# EAGLE board AMS Test Board rev1 (EAGLE 9.6.2)
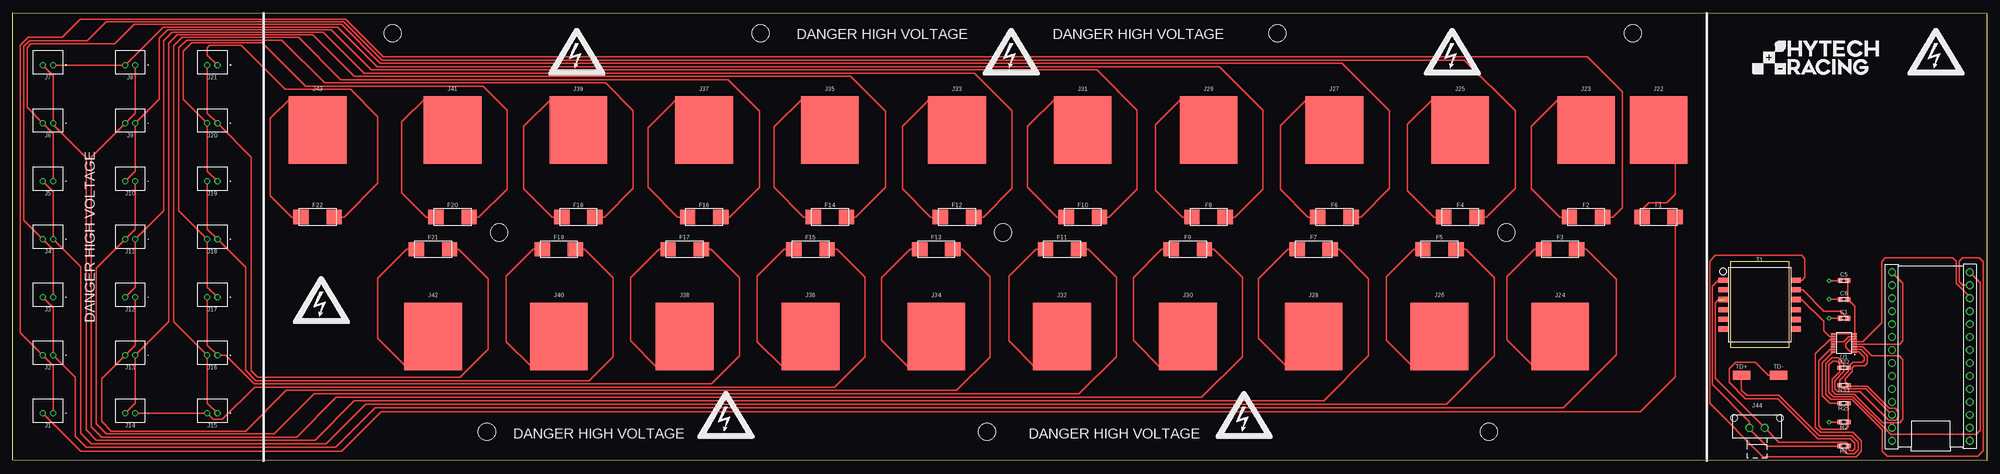
[diagram p0: board, top side]
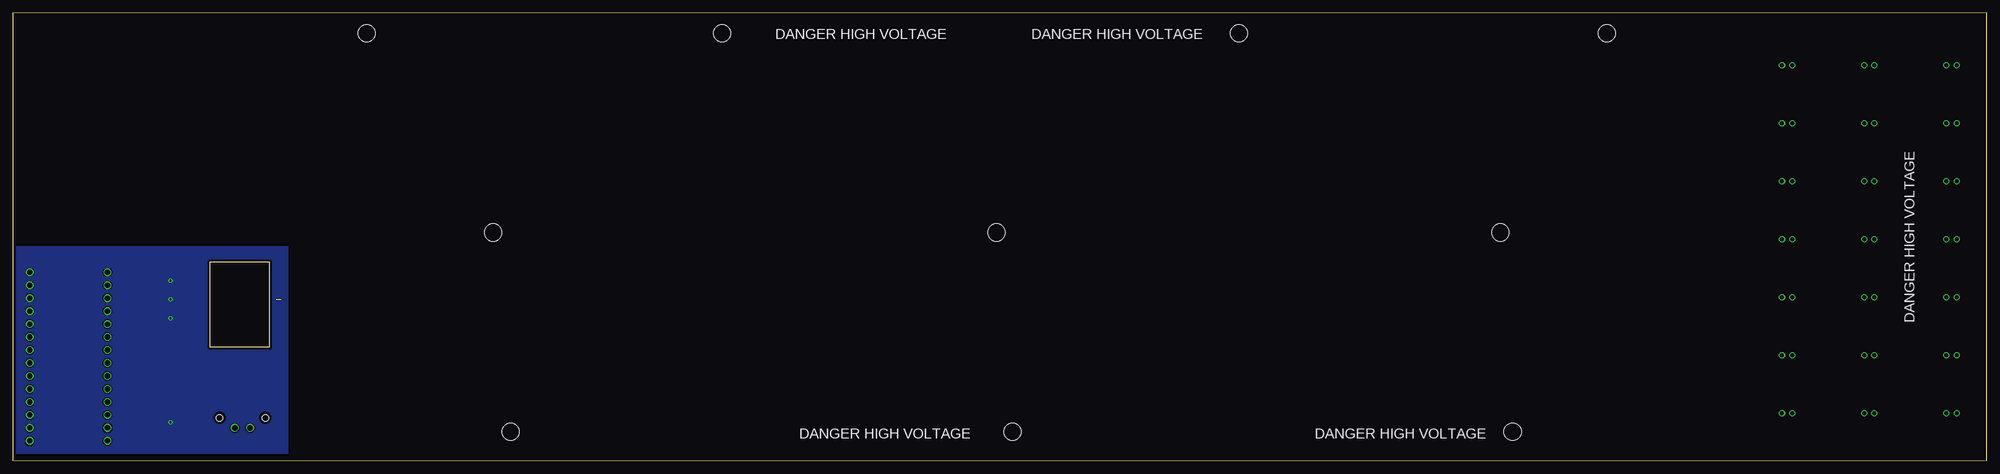
[diagram p1: board, bottom side, seen from below]

Size 386.61 x 87.73 mm. Coordinates in mm from the lower left corner, seen from the top.
Outline: 0,0.1 0,87.73 386.61,87.63 386.61,0 0,0.1
Copper layers (1*16): Top 0.035mm / dielectric 1.53mm / Bottom 0.035mm
Design rules "HyTech Default (2 Layer)": minimum track width 6mil, minimum drill 14mil, track to track 6mil, track to pad 6mil, pad to pad 6mil, via to via 20mil, smd to smd 6mil, copper to edge 20mil, drill to drill 21mil, minimum pad ring 7mil, minimum via ring 8mil, stop-mask expansion 6mil, vias tented up to drill 30mil, thermal gap 10mil

## Footprints (pad centres in the part's own frame; a part is rotated, then mirrored left to right if it is on the bottom)
TEENSY_SHORT = drill 1.016: 3.3V 0,5.08; AGND/GND 0,2.54; D0 15.24,2.54; D1 15.24,5.08; D2 15.24,7.62; D3 15.24,10.16; D4 15.24,12.7; D5 15.24,15.24; D6 15.24,17.78; D7 15.24,20.32; D8 15.24,22.86; D9 15.24,25.4; D10 15.24,27.94; D11 15.24,30.48; D12 15.24,33.02; D13 0,33.02; D14 0,30.48; D15 0,27.94; D16 0,25.4; D17 0,22.86; D18 0,20.32; D19 0,17.78; D20 0,15.24; D21 0,12.7; D22 0,10.16; D23 0,7.62; GND 15.24,0; VIN 0,0
0603-CAP = smd 0.9 x 0.9: 1 -0.75,0; 2 0.75,0
OMF_125 = smd 3 x 2.8: 1 -3.25,0; 2 3.25,0
B2B-PH-K = drill 0.8: 1 -1,0.55; 2 1,0.55
5222 = smd 11.303 x 13.208: 1 0,0
MOLEX_MICROFIT_PTH_VERTICAL_02_SINGLE = drill 1.067: 1 1.499,0; 2 -1.499,0 | hole 1.321: 4.496,-1.956; -4.496,-1.956
0603-RES = smd 0.9 x 0.8: 1 -0.85,0; 2 0.85,0
HM2112ZNLT_AIRGAP = smd 1.02 x 1.89: 1 -4.78,-7.145; 2 -2.89,-7.145; 3 -1,-7.145; 4 1,-7.145; 5 2.875,-7.145; 6 4.78,-7.145; 7 4.78,7.145; 8 2.89,7.145; 9 1,7.145; 10 -1,7.145; 11 -2.89,7.145; 12 -4.78,7.145
MICRO_MINIATURE = smd 3.429 x 1.778: 1 0,0
MSOP-16 = smd 0.305 x 0.889: 1 -1.75,-2.106; 2 -1.25,-2.106; 3 -0.75,-2.106; 4 -0.25,-2.106; 5 0.25,-2.106; 6 0.75,-2.106; 7 1.25,-2.106; 8 1.75,-2.106; 9 1.75,2.106; 10 1.25,2.106; 11 0.75,2.106; 12 0.25,2.106; 13 -0.25,2.106; 14 -0.75,2.106; 15 -1.25,2.106; 16 -1.75,2.106
MOUNTING_M3 = hole 3.4: 0,0

## Placement (x,y rotation side)
A1  TEENSY_4.0  [TEENSY_SHORT]  368.05,3.91 0 top
C1  CAPACITOR_0603_10V_10NF  [0603-CAP]  358.65,27.91 180 top
C5  CAPACITOR_0603_10V_0.1UF  [0603-CAP]  358.65,35.28 180 top
C6  CAPACITOR_0603_10V_10NF  [0603-CAP]  358.65,31.6 0 top
F1  FUSE_OMF_125_.5A  [OMF_125]  322.35,47.73 0 top
F2  FUSE_OMF_125_.5A  [OMF_125]  308.13,47.73 0 top
F3  FUSE_OMF_125_.5A  [OMF_125]  303.05,41.43 0 top
F4  FUSE_OMF_125_.5A  [OMF_125]  283.49,47.73 0 top
F5  FUSE_OMF_125_.5A  [OMF_125]  279.43,41.43 0 top
F6  FUSE_OMF_125_.5A  [OMF_125]  258.85,47.73 0 top
F7  FUSE_OMF_125_.5A  [OMF_125]  254.79,41.43 0 top
F8  FUSE_OMF_125_.5A  [OMF_125]  234.21,47.73 0 top
F9  FUSE_OMF_125_.5A  [OMF_125]  230.15,41.43 0 top
F10  FUSE_OMF_125_.5A  [OMF_125]  209.58,47.73 0 top
F11  FUSE_OMF_125_.5A  [OMF_125]  205.51,41.43 0 top
F12  FUSE_OMF_125_.5A  [OMF_125]  184.94,47.73 0 top
F13  FUSE_OMF_125_.5A  [OMF_125]  180.87,41.43 0 top
F14  FUSE_OMF_125_.5A  [OMF_125]  160.05,47.73 0 top
F15  FUSE_OMF_125_.5A  [OMF_125]  156.24,41.43 0 top
F16  FUSE_OMF_125_.5A  [OMF_125]  135.41,47.73 0 top
F17  FUSE_OMF_125_.5A  [OMF_125]  131.6,41.43 0 top
F18  FUSE_OMF_125_.5A  [OMF_125]  110.77,47.73 0 top
F19  FUSE_OMF_125_.5A  [OMF_125]  106.96,41.43 0 top
F20  FUSE_OMF_125_.5A  [OMF_125]  86.13,47.73 0 top
F21  FUSE_OMF_125_.5A  [OMF_125]  82.32,41.43 0 top
F22  FUSE_OMF_125_.5A  [OMF_125]  59.72,47.73 0 top
J1  CONNECTOR-2__B2B-PH-K  [B2B-PH-K]  6.9,9.84 180 top
J2  CONNECTOR-2__B2B-PH-K  [B2B-PH-K]  6.9,21.2 180 top
J3  CONNECTOR-2__B2B-PH-K  [B2B-PH-K]  6.9,32.56 180 top
J4  CONNECTOR-2__B2B-PH-K  [B2B-PH-K]  6.9,43.92 180 top
J5  CONNECTOR-2__B2B-PH-K  [B2B-PH-K]  6.9,55.28 180 top
J6  CONNECTOR-2__B2B-PH-K  [B2B-PH-K]  6.9,66.64 180 top
J7  CONNECTOR-2__B2B-PH-K  [B2B-PH-K]  6.9,78 180 top
J8  CONNECTOR-2__B2B-PH-K  [B2B-PH-K]  23,78 180 top
J9  CONNECTOR-2__B2B-PH-K  [B2B-PH-K]  23,66.64 180 top
J10  CONNECTOR-2__B2B-PH-K  [B2B-PH-K]  23,55.28 180 top
J11  CONNECTOR-2__B2B-PH-K  [B2B-PH-K]  23,43.92 180 top
J12  CONNECTOR-2__B2B-PH-K  [B2B-PH-K]  23,32.56 180 top
J13  CONNECTOR-2__B2B-PH-K  [B2B-PH-K]  23,21.2 180 top
J14  CONNECTOR-2__B2B-PH-K  [B2B-PH-K]  23,9.84 180 top
J15  CONNECTOR-2__B2B-PH-K  [B2B-PH-K]  39.1,9.84 180 top
J16  CONNECTOR-2__B2B-PH-K  [B2B-PH-K]  39.1,21.2 180 top
J17  CONNECTOR-2__B2B-PH-K  [B2B-PH-K]  39.1,32.56 180 top
J18  CONNECTOR-2__B2B-PH-K  [B2B-PH-K]  39.1,43.92 180 top
J19  CONNECTOR-2__B2B-PH-K  [B2B-PH-K]  39.1,55.28 180 top
J20  CONNECTOR-2__B2B-PH-K  [B2B-PH-K]  39.1,66.64 180 top
J21  CONNECTOR-2__B2B-PH-K  [B2B-PH-K]  39.1,78 180 top
J22  CONNECTOR-1_5222  [5222]  322.35,64.77 0 top
J23  CONNECTOR-1_5222  [5222]  308.13,64.77 0 top
J24  CONNECTOR-1_5222  [5222]  303.05,24.38 0 top
J25  CONNECTOR-1_5222  [5222]  283.49,64.77 0 top
J26  CONNECTOR-1_5222  [5222]  279.43,24.38 0 top
J27  CONNECTOR-1_5222  [5222]  258.85,64.77 0 top
J28  CONNECTOR-1_5222  [5222]  254.79,24.38 0 top
J29  CONNECTOR-1_5222  [5222]  234.21,64.77 0 top
J30  CONNECTOR-1_5222  [5222]  230.15,24.38 0 top
J31  CONNECTOR-1_5222  [5222]  209.58,64.77 0 top
J32  CONNECTOR-1_5222  [5222]  205.51,24.38 0 top
J33  CONNECTOR-1_5222  [5222]  184.94,64.77 0 top
J34  CONNECTOR-1_5222  [5222]  180.87,24.38 0 top
J35  CONNECTOR-1_5222  [5222]  160.05,64.77 0 top
J36  CONNECTOR-1_5222  [5222]  156.24,24.38 0 top
J37  CONNECTOR-1_5222  [5222]  135.41,64.77 0 top
J38  CONNECTOR-1_5222  [5222]  131.6,24.38 0 top
J39  CONNECTOR-1_5222  [5222]  110.77,64.77 0 top
J40  CONNECTOR-1_5222  [5222]  106.96,24.38 0 top
J41  CONNECTOR-1_5222  [5222]  86.13,64.77 0 top
J42  CONNECTOR-1_5222  [5222]  82.32,24.38 0 top
J43  CONNECTOR-1_5222  [5222]  59.72,64.77 0 top
J44  CONNECTOR-2_MF_T_V_  [MOLEX_MICROFIT_PTH_VERTICAL_02_SINGLE]  341.63,6.45 180 top
R1  RESISTOR_0603_120  [0603-RES]  358.65,2.9 180 top
R2  RESISTOR_0603_1K  [0603-RES]  358.65,7.59 180 top
R25  RESISTOR_0603_1K  [0603-RES]  358.65,11.28 0 top
R32  RESISTOR_0603_2K  [0603-RES]  358.65,18.26 0 top
R33  RESISTOR_0603_2K  [0603-RES]  358.65,14.83 180 top
T1  TRANSFORMER_HM2112ZNLT_AIRGAP  [HM2112ZNLT_AIRGAP]  342.14,30.58 270 top
TD+  TEST_POINT  [MICRO_MINIATURE]  338.58,16.74 0 top
TD-  TEST_POINT  [MICRO_MINIATURE]  345.82,16.74 0 top
U1  LTC6820  [MSOP-16]  358.65,23.09 90 top
U$1  [MOUNTING_M3]  74.37,83.69 0 top
U$2  [MOUNTING_M3]  146.46,83.69 0 top
U$3  [MOUNTING_M3]  247.68,83.69 0 top
U$4  [MOUNTING_M3]  317.32,83.69 0 top
U$5  [HV_LARGE]  60.45,31.47 0 top
U$6  [HV_LARGE]  415.8,39.47 0 bottom  (outside the outline)
U$7  [HV_LARGE]  376.68,80.11 0 top
U$8  [HV_LARGE]  139.7,8.99 0 top
U$9  [HV_LARGE]  241.17,8.99 0 top
U$10  [HV_LARGE]  281.94,80.11 0 top
U$11  [HV_LARGE]  195.58,80.11 0 top
U$12  [HV_LARGE]  110.49,80.11 0 top
U$13  [DANGER_HIGH_VOLTAGE]  114.81,5.31 0 top
U$14  [DANGER_HIGH_VOLTAGE]  215.77,5.31 0 top
U$15  [DANGER_HIGH_VOLTAGE]  170.31,83.54 0 top
U$16  [DANGER_HIGH_VOLTAGE]  220.47,83.54 0 top
U$17  [DANGER_HIGH_VOLTAGE]  401.32,42.6 90 top  (outside the outline)
U$18  [DANGER_HIGH_VOLTAGE]  15.11,43.87 90 top
U$19  [LOGO_HYTECH_MEDIUM]  340.61,75.67 0 top
U$20  [MOUNTING_M3]  95.28,44.7 0 top
U$21  [MOUNTING_M3]  193.95,44.7 0 top
U$22  [MOUNTING_M3]  292.51,44.7 0 top
U$29  [MOUNTING_M3]  92.86,5.72 0 top
U$30  [MOUNTING_M3]  190.78,5.72 0 top
U$31  [MOUNTING_M3]  289.08,5.72 0 top

## Library data of the parts
A1 = HyTechDevices; TEENSY: 4.0
C1 = HyTechDevices - Copy; CAPACITANCE: 10nF; DKPN: 311-4054-1-ND; MANUFACTURER: Yageo; MOPN: 603-CC603KRX7R6BB103; MPN: CC0603KRX7R6BB103; TOLERANCE: 10%; VOLTAGE: 10V
C5 = HyTechDevices; CAPACITANCE: 0.1µF; DKPN: 720-1688-1-ND; MANUFACTURER: Vishay Vitramon; MOPN: 77-VJ0603Y104JXQPBC; MPN: VJ0603Y104JXQPW1BC; TOLERANCE: 5%; VOLTAGE: 10V
C6 = HyTechDevices; CAPACITANCE: 10nF; DKPN: 311-4054-1-ND; MANUFACTURER: Yageo; MOPN: 603-CC603KRX7R6BB103; MPN: CC0603KRX7R6BB103; TOLERANCE: 10%; VOLTAGE: 10V
F1-F22 = HyTechDevices; CURRENT: 500mA; DKPN: 486-3694-ND; FUSE_TYPE: SMD; I2T: 0.01; MANUFACTURER: Schurter Inc.; MOPN: 693-3404.0045.11; MPN: 3404.0045.11; VOLTAGE: 125V
J1-J21 = HyTechDevices; DKPN: 455-1704-ND; MANUFACTURER: JST Sales America Inc.; MPN: B2B-PH-K-S(LF)(SN); NWRKPN: 37K9940
J22-J43 = HyTechDevices; DKPN: 36-5222-ND; MANUFACTURER: Keystone Electronics; MODEL: SPRING; MOPN: 534-5222; MPN: 5222
J44 = HyTechDevices - Copy; MANUFACTURER: MOLEX; MPN: 436500217
R1 = HyTechDevices; DKPN: P120DBCT-ND; MANUFACTURER: Panasonic Electronic Components; MOPN: 667-ERA-3AEB121V; MPN: ERA-3AEB121V; POWER: 0.1W; RESISTANCE: 120; TOLERANCE: 0.1%; VOLTAGE_CONTINUOUS: 3.46V; VOLTAGE_MAX: 75V
R2 R25 = HyTechDevices - Copy; DKPN: 311-1.00KHRCT-ND; MANUFACTURER: Yageo; MOPN: 603-RC0603FR-071KL; MPN: RC0603FR-071KL; POWER: 0.1W; RESISTANCE: 1k; TOLERANCE: 1%; VOLTAGE_CONTINUOUS: 10.00V; VOLTAGE_MAX: 75V
R32 R33 = HyTechDevices; DKPN: P2.0KBDCT-ND; MANUFACTURER: Panasonic Electronic Components; MOPN: 667-ERA-3ARB202V; MPN: ERA-3ARB202V; POWER: 0.1W; RESISTANCE: 2k; TOLERANCE: 0.1%; VOLTAGE_CONTINUOUS: 14.14V; VOLTAGE_MAX: 75V
T1 = HyTechDevices; DKPN: 1840-1036-1-ND; MANUFACTURER: Pulse Electronics; MOPN: 673-HM2112ZNLT; MPN: HM2112ZNLT
TD+ TD- = HyTechDevices - Copy; DKPN: 36-5015CT-ND; MANUFACTURER: Keystone Electronics; MOPN: 534-5015; MPN: 5015
U1 = HyTechDevices; MANUFACTURER: Analog Devices; MPN: LTC6820IMS#PBF
U$1-U$22 U$29-U$31 = HyTechManufacturing

## Nets
1-: F1.2 J1.2
2-: F2.2 J1.1 J2.2
3-: F3.2 J2.1 J3.2
4-: F4.2 J3.1 J4.2
5-: F5.2 J4.1 J5.2
6-: F6.2 J5.1 J6.2
7-: F7.2 J6.1 J7.2
8-: F8.2 J7.1 J8.2
9-: F9.2 J8.1 J9.2
10-: F10.2 J9.1 J10.2
11-: F11.2 J10.1 J11.2
12-: F12.2 J11.1 J12.2
13-: F13.2 J12.1 J13.2
14-: F14.2 J13.1 J14.2
15-: F15.2 J14.1 J15.2
16-: F16.2 J15.1 J16.2
17-: F17.2 J16.1 J17.2
18-: F18.2 J17.1 J18.2
19-: F19.2 J18.1 J19.2
20-: F20.2 J19.1 J20.2
21+: F22.2 J21.1
21-: F21.2 J20.1 J21.2
+3V3: A1.3.3V C5.1 C6.2 R32.2 R33.2 U1.1 U1.6 U1.7 U1.8 U1.9 U1.12
GND: A1.AGND/GND A1.GND C1.2 C5.2 C6.1 R2.2
IM: T1.10 U1.10
IP: T1.12 U1.11
N$1: F1.1 J22.1
N$2: F2.1 J23.1
N$3: F3.1 J24.1
N$4: F4.1 J25.1
N$5: F5.1 J26.1
N$6: F6.1 J27.1
N$7: F7.1 J28.1
N$8: F8.1 J29.1
N$9: F9.1 J30.1
N$10: F10.1 J31.1
N$11: F11.1 J32.1
N$12: F12.1 J33.1
N$13: F13.1 J34.1
N$14: F14.1 J35.1
N$15: F15.1 J36.1
N$16: F16.1 J37.1
N$17: F17.1 J38.1
N$18: F18.1 J39.1
N$19: F19.1 J40.1
N$20: F20.1 J41.1
N$21: F21.1 J42.1
N$22: F22.1 J43.1
N$23: C1.1 T1.11
N$24: A1.D13 U1.4
N$25: A1.D12 R32.1 U1.3
N$26: A1.D11 R33.1 U1.2
N$27: A1.D10 U1.5
N$28: U1.13 U1.14
N$30: R25.1 U1.16
N$31: R2.1 R25.2 U1.15
TD+: J44.1 R1.2 T1.1 TD+.1
TD-: J44.2 R1.1 T1.3 TD-.1
VIN: A1.VIN

## Tracks (layer width: path | path; a pad name or v marks a point on that pad's centre or on a via)
1-
  Top 0.254: J1.2 13.31,1.88 64.39,1.88 72.14,9.63 318.77,9.63 325.63,16.48 325.63,43.28 325.63,47.7 F1.2
2-
  Top 0.254: J1.1 7.9,18.65 J2.2 1.5,25.05 1.5,81.36 3.05,82.91 9.67,82.91 13.21,86.45 65.17,86.45 72.52,79.1 308.36,79.1 315.21,72.24 315.21,49.53 313.41,47.73 F2.2
3-
  Top 0.254: J3.2 7.9,30.01 J2.1 12.19,16.35 12.19,4.79 14.35,2.64 63.25,2.64 70.99,10.39 303.66,10.39 314.07,20.8 314.07,35.56 308.2,41.43 F3.2
4-
  Top 0.254: J3.1 7.9,41.37 J4.2 2.16,47.11 2.16,81.13 3.3,82.27 14.61,82.27 18.29,85.95 64.84,85.95 72.33,78.46 284.35,78.46 294.26,68.55 294.26,53.34 288.64,47.73 F4.2
5-
  Top 0.254: J5.2 7.9,52.73 J4.1 13.31,37.96 13.31,5.39 15.33,3.38 61.38,3.38 69.1,11.1 280.75,11.1 290.19,20.55 290.19,35.81 284.58,41.43 F5.2
6-
  Top 0.254: F6.2 264.01,47.73 269.62,53.34 269.62,68.55 260.32,77.85 71.98,77.85 64.39,85.45 23.75,85.45 19.94,81.64 3.56,81.64 2.79,80.87 2.79,69.19 J6.2 7.9,64.09 J5.1
7-
  Top 0.254: J7.2 7.9,75.45 J6.1 7.9,65.83 14.35,59.38 14.35,6.07 16.38,4.04 59.18,4.04 66.9,11.76 256.77,11.76 265.56,20.55 265.56,35.69 259.81,41.43 F7.2
8-
  Top 0.254: J7.1 J8.2 29.49,84.94 63.63,84.94 71.37,77.19 236.35,77.19 244.86,68.68 244.86,53.21 239.37,47.73 F8.2
9-
  Top 0.254: J8.1 24,68.09 J9.2 15.34,59.43 15.34,6.66 17.38,4.62 55.58,4.62 63.37,12.42 232.79,12.42 240.79,20.42 240.79,35.94 235.3,41.43 F9.2
10-
  Top 0.254: J10.2 24,56.73 J9.1 28.7,70.79 28.7,82.78 30.35,84.43 62.36,84.43 70.23,76.56 212.34,76.56 220.22,68.68 220.22,53.21 214.73,47.73 F10.2
11-
  Top 0.254: J10.1 24,45.37 J11.2 16.38,37.75 16.38,7.21 18.31,5.28 51.16,5.28 59,13.13 208.86,13.13 216.15,20.42 216.15,35.94 210.67,41.43 F11.2
12-
  Top 0.254: J12.2 24,34.01 J11.1 29.59,48.96 29.59,82.27 31.24,83.92 60.83,83.92 68.83,75.92 188.34,75.92 195.71,68.55 195.71,53.34 190.09,47.73 F12.2
13-
  Top 0.254: J12.1 24,22.65 J13.2 17.4,16.05 17.4,7.72 19.3,5.82 45.59,5.82 53.57,13.79 184.89,13.79 191.39,20.29 191.39,36.07 186.03,41.43 F13.2
14-
  Top 0.254: J14.2 24,11.29 J13.1 30.58,27.23 30.58,81.8 32.22,83.44 58.72,83.44 66.87,75.29 164.08,75.29 170.94,68.43 170.94,53.6 165.07,47.73 F14.2
15-
  Top 0.254: J14.1 J15.2 39.26,8.12 41.04,8.12 47.37,14.45 160.91,14.45 166.88,20.42 166.88,35.94 161.39,41.43 F15.2
16-
  Top 0.254: J15.1 38.1,11.29 J16.2 31.5,27.25 31.5,81.25 33.15,82.91 56.01,82.91 64.26,74.65 140.08,74.65 146.3,68.43 146.3,53.6 140.44,47.73 F16.2
17-
  Top 0.254: J17.2 38.1,22.65 J16.1 41.75,20.65 47.31,15.09 136.91,15.09 142.37,20.55 142.37,35.81 136.75,41.43 F17.2
18-
  Top 0.254: J17.1 38.1,34.01 J18.2 32.51,48.95 32.51,80.87 34.04,82.4 52.7,82.4 61.09,74.02 116.08,74.02 121.54,68.55 121.54,53.34 115.92,47.73 F18.2
19-
  Top 0.254: J19.2 38.1,45.37 J18.1 45.59,37.87 45.59,17.75 47.62,15.72 112.9,15.72 117.6,20.42 117.6,35.81 111.99,41.43 F19.2
20-
  Top 0.254: J19.1 38.1,56.73 J20.2 33.4,70.79 33.4,80.24 35.05,81.89 48.9,81.89 57.4,73.38 92.08,73.38 96.77,68.68 96.77,53.21 91.29,47.73 F20.2
21+
  Top 0.254: J21.1 38.1,79.45 38.1,80.87 38.61,81.38 44.7,81.38 53.34,72.75 66.17,72.75 71.5,67.41 71.5,54.36 64.87,47.73 F22.2
21-
  Top 0.254: J21.2 38.1,68.09 J20.1 46.74,59.45 46.74,17.63 48.01,16.36 87.63,16.36 93.09,21.82 93.09,35.69 87.35,41.43 F21.2
+3V3
  Top 0.254: C5.1 C6.2 360.75,30.24 U1.8 | U1.7 U1.6 359.91,23.84 359.03,22.96 359.03,22.2 359.89,21.34 U1.1 361.54,21.34 362.58,20.29 362.58,19.66 362.2,19.28 360.39,19.28 359.5,18.39 R32.2 359.5,17.5 357.8,15.8 R33.2 357.89,14.83 358.65,14.07 362.97,14.07 A1.3.3V | U1.7 U1.8 | U1.12 358.64,23.34 359.64,24.34 U1.7 | U1.8 U1.9
GND  (via drill 0.38)
  Top 0.254: R2.2 v355.73,7.59 | C1.2 v355.73,27.91 | C6.1 v355.73,31.6 | C5.2 v355.73,35.28
  pour Bottom: 332.74,42.01 332.74,1.37 386.08,1.37 386.08,42.01
IM
  Top 0.254: U1.10 355.87,24.34 354.71,25.5 354.71,27.3 350.43,31.58 T1.10
IP
  Top 0.254: T1.12 350.47,35.36 351.03,35.92 351.03,39.6 350.39,40.23 333.5,40.23 332.36,39.09 332.36,11.28 342.79,0.84 361.04,0.84 362.08,1.88 362.08,3.91 360.43,5.56 354.08,5.56 353.06,6.58 353.06,20.94 355.96,23.84 U1.11
N$1
  Top 0.254: F1.1 319.1,49.2 320.42,50.52 323.98,50.52 325.63,52.17 325.63,61.82 322.68,64.77 J22.1
N$2
  Top 0.254: F2.1 302.97,47.73 297.43,53.26 297.43,65.51 303.15,71.22 306.07,71.22 308.61,68.68 308.61,67.41 307.34,66.14 307.34,65.56 J23.1
N$3
  Top 0.254: F3.1 298.02,41.43 292.61,36.02 292.61,23.72 298.2,18.14 301.24,18.14 303.53,20.42 303.53,23.9 J24.1
N$4
  Top 0.254: J25.1 283.4,64.68 283.21,64.87 283.21,69.95 281.94,71.22 278.51,71.22 273.18,65.89 273.18,52.88 278.33,47.73 F4.1
N$5
  Top 0.254: F5.1 274.4,41.43 268.99,36.02 268.99,23.6 274.19,18.39 277.37,18.39 279.4,20.42 279.4,24.36 J26.1
N$6
  Top 0.254: F6.1 253.7,47.73 248.28,53.14 248.28,65.63 253.87,71.22 256.54,71.22 259.08,68.68 259.08,65 J27.1
N$7
  Top 0.254: F7.1 249.76,41.43 243.97,35.63 243.97,23.98 249.81,18.14 251.71,18.14 255.27,21.69 255.27,23.9 J28.1
N$8
  Top 0.254: F8.1 229.06,47.73 223.77,53.01 223.77,65.76 229.24,71.22 232.41,71.22 233.68,69.95 233.68,65.3 J29.1
N$9
  Top 0.254: F9.1 224.99,41.43 219.46,35.89 219.46,23.6 224.92,18.14 228.85,18.14 230.15,19.43 J30.1
N$10
  Top 0.254: F10.1 204.55,47.73 198.75,53.52 198.75,65.51 204.47,71.22 205.74,71.22 207.01,69.95 207.01,67.34 J31.1
N$11
  Top 0.254: F11.1 200.36,41.43 195.07,36.14 195.07,23.47 200.28,18.26 203.58,18.26 205.74,20.42 205.74,24.16 J32.1
N$12
  Top 0.254: F12.1 179.78,47.73 174.24,53.26 174.24,65.51 179.96,71.22 182.88,71.22 185.42,68.68 185.42,64.87 185.04,64.87 J33.1
N$13
  Top 0.254: F13.1 175.72,41.43 170.18,35.89 170.18,23.6 175.39,18.39 178.31,18.39 180.87,20.95 J34.1
N$14
  Top 0.254: J35.1 160.02,64.74 160.02,68.68 157.48,71.22 154.94,71.22 149.1,65.38 149.1,53.52 154.89,47.73 F14.1
N$15
  Top 0.254: J36.1 156.46,24.16 156.21,23.9 156.21,20.42 154.18,18.39 150.75,18.39 145.8,23.34 145.8,36.14 151.08,41.43 F15.1
N$16
  Top 0.254: F16.1 130.25,47.73 124.46,53.52 124.46,65.25 130.43,71.22 133.35,71.22 135.89,68.68 135.89,65.25 J37.1
N$17
  Top 0.254: F17.1 126.57,41.43 121.03,35.89 121.03,23.47 126.24,18.26 127.38,18.26 131.6,22.48 J38.1
N$18
  Top 0.254: F18.1 105.61,47.73 100.08,53.26 100.08,65.51 105.79,71.22 107.95,71.22 110.49,68.68 110.49,64.87 110.68,64.68 J39.1
N$19
  Top 0.254: J40.1 106.83,24.38 106.83,20.57 104.65,18.39 101.6,18.39 96.65,23.34 96.65,36.14 101.93,41.43 F19.1
N$20
  Top 0.254: F20.1 80.98,47.73 76.2,52.5 76.2,66.4 81.03,71.22 83.82,71.22 85.09,69.95 85.09,65.81 J41.1 | J41.1 86.36,64.54 86.36,63.6 86.13,63.83 J41.1
N$21
  Top 0.254: F21.1 77.17,41.43 71.5,35.76 71.5,23.98 77.22,18.26 80.39,18.26 82.55,20.42 82.55,24.16 J42.1
N$22
  Top 0.152: 59.69,64.8 J43.1
  Top 0.254: F22.1 54.61,47.73 50.42,51.92 50.42,67.03 54.61,71.22 57.15,71.22 59.69,68.68 59.69,64.8
N$23
  Top 0.254: C1.1 358,29.31 354.71,29.31 350.55,33.47 T1.11
N$24
  Top 0.254: U1.4 369.57,22.84 370.2,23.47 370.2,34.77 A1.D13
N$25
  Top 0.254: A1.D12 385.32,34.9 385.32,5.94 384.56,5.18 367.79,5.18 360.41,12.57 356.6,12.57 355.73,13.44 355.73,18.77 356.49,19.53 357.38,19.53 357.8,19.11 R32.1 357.8,17.48 356.33,16.02 356.33,13.72 357,13.06 360.64,13.06 366.23,7.47 369.57,7.47 370.2,8.1 370.2,19.79 369.44,20.55 364.11,20.55 362.32,22.34 U1.3
N$26
  Top 0.254: U1.2 361.93,21.84 363.22,20.55 363.22,19.15 362.71,18.64 360.68,18.64 360.3,18.26 360.3,17.5 358.86,16.06 358.86,15.47 R33.1 359.75,14.58 363.22,14.58 367.54,10.26 368.68,10.26 369.32,9.63 369.32,8.48 368.81,7.98 367.41,7.98 361.82,13.56 357.41,13.56 356.87,14.1 356.87,15.72 358.65,17.5 358.65,19.02 357.5,20.17 356.24,20.17 355.09,19.02 355.09,13.06 356.11,12.04 360.17,12.04 366.14,6.07 366.14,1.88 367.16,0.86 384.81,0.86 385.95,2.01 385.95,38.96 385.19,39.73 381.89,39.73 381.25,39.09 381.25,35.03 381.89,34.39 A1.D11
N$27
  Top 0.254: U1.5 362.35,23.34 366.01,27 366.01,38.96 366.78,39.73 379.98,39.73 380.62,39.09 380.62,34.77 383.29,32.11 A1.D10
N$28
  Top 0.254: U1.14 U1.13
N$30
  Top 0.254: R25.1 355.89,11.28 354.38,12.79 354.38,19.18 U1.16
N$31
  Top 0.254: R25.2 R2.1 359.5,6.67 359.03,6.2 354.33,6.2 353.69,6.83 353.69,19.57 355.96,21.84 U1.15
TD+
  Top 0.254: T1.1 334.01,35.36 332.87,34.22 332.87,14.96 340.13,7.7 J44.1 340.13,6.32 343.56,2.9 R1.2 359.32,1.37 360.68,1.37 361.44,2.13 361.44,3.66 360.17,4.93 353.79,4.93 345.92,12.8 339.6,12.8 338.58,13.82 TD+.1
TD-  (1 unrouted)
  Top 0.254: 334.04,31.58 333.41,30.96 333.41,16.19 343.13,6.48 J44.2 345.92,3.66 358.99,3.66 359.5,3.15 R1.1 359.5,2.26 359.75,2.01 360.43,2.01 360.81,2.39 360.81,3.4 359.92,4.29 353.57,4.29 345.69,12.17 339.34,12.17 336.17,15.34 336.17,18.01 337.44,19.28 341.25,19.28 343.79,16.74 TD-.1

## Text on the board
tPlace: AMS Test Board Rev 1 / HyTech Racing 2023 / Designed by Ethan Su